# EAGLE board RatDBS-2032-2Variant (EAGLE 7.3.0)
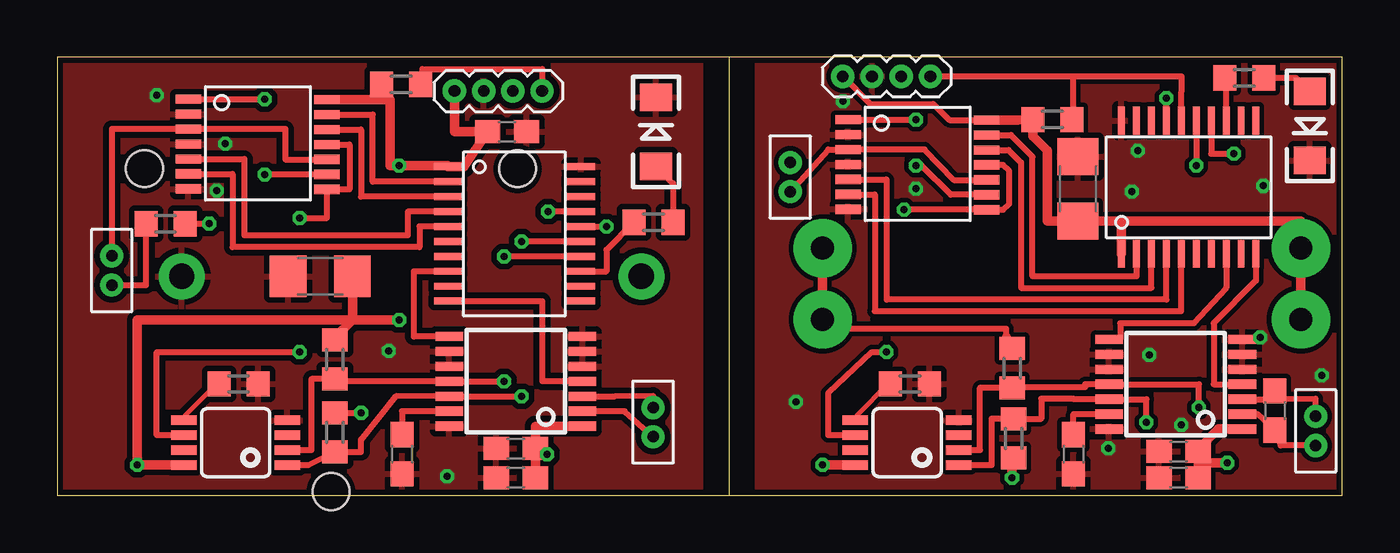
[diagram p0: board, top side]
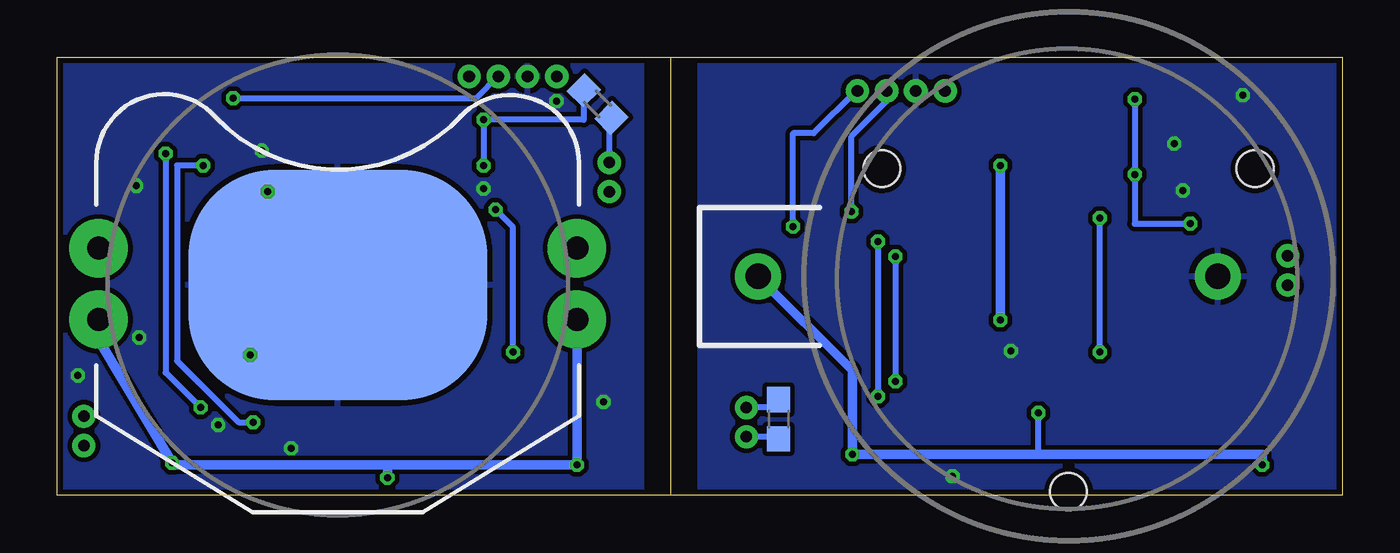
[diagram p1: board, bottom side, seen from below]

Size 55.88 x 19.05 mm. Coordinates in mm from the lower left corner, seen from the top.
Outline: 29.21,0 0,0 0,19.05 29.21,19.05
Outline: 29.21,0 55.88,0 55.88,19.05 29.21,19.05
Outline: 29.21,19.05 29.21,0
Copper layers (1*16): Top 0.035mm / dielectric 1.5mm / Bottom 0.035mm
Design rules "Seeed_DRU *": minimum track width 6mil, minimum drill 12mil, track to track 8mil, track to pad 8mil, pad to pad 8mil, via to via 8mil, smd to smd 0mil, copper to edge 10mil, drill to drill 10mil, minimum pad ring 10mil, minimum via ring 6mil, stop-mask expansion 2mil, vias tented up to drill 100mil, thermal gap 10mil

## Footprints (pad centres in the part's own frame; a part is rotated, then mirrored left to right if it is on the bottom)
FTSH-102-DH = drill 0.5 pad 1: P$1 -0.635,0; P$2 0.635,0
BATTCOM_20MM_PLASTIC_STUDS = drill 1.1 pad 2: 1 13.5,0; 2 -6.5,0 | hole 1.6: 0,9.37; -8.115,-4.685; 8.115,-4.685
BATTCON_20MM_PTH_COMPACT = drill 1 pad 2.54: 1 -10.4,1.6; 3 10.4,1.6; 4 10.4,-1.5; 5 -10.4,-1.5 | smd 13 x 10: 2 0,0
C0603 = smd 1.1 x 1: 1 -0.85,0; 2 0.85,0
C1206 = smd 1.6 x 1.8: 1 -1.4,0; 2 1.4,0
8_PIN = smd 1.1 x 0.4: 1 -2.25,0.975; 2 -2.25,0.325; 3 -2.25,-0.325; 4 -2.25,-0.975; 5 2.25,-0.975; 6 2.25,-0.325; 7 2.25,0.325; 8 2.25,0.975
1X04-1.27MM = drill 0.508 pad 1: 1 0,0; 2 1.27,0; 3 2.54,0; 4 3.81,0
LED-1206 = smd 1.2 x 1.4: A -1.5,0; C 1.5,0
20_PIN = smd 0.3 x 1.2: 1 -2.925,-2.9; 2 -2.275,-2.9; 3 -1.625,-2.9; 4 -0.975,-2.9; 5 -0.325,-2.9; 6 0.325,-2.9; 7 0.975,-2.9; 8 1.625,-2.9; 9 2.275,-2.9; 10 2.925,-2.9; 11 2.925,2.9; 12 2.275,2.9; 13 1.625,2.9; 14 0.975,2.9; 15 0.325,2.9; 16 -0.325,2.9; 17 -0.975,2.9; 18 -1.625,2.9; 19 -2.275,2.9; 20 -2.925,2.9
R0603 = smd 1 x 1.1: 1 -0.85,0; 2 0.85,0
14_PIN = smd 1.1 x 0.4: 1 -3.26,1.165; 2 -3.26,0.515; 3 -3.26,-0.135; 4 -3.26,-0.785; 5 -3.26,-1.435; 6 -3.26,-2.085; 7 -3.26,-2.735; 8 2.77,-2.755; 9 2.77,-2.105; 10 2.77,-1.455; 11 2.77,-0.805; 12 2.77,-0.155; 13 2.77,0.495; 14 2.77,1.145
PW_R-PDSO-G14 = smd 0.4 x 1.2: 1 -1.95,-2.9; 2 -1.3,-2.9; 3 -0.65,-2.9; 4 0,-2.9; 5 0.65,-2.9; 6 1.3,-2.9; 7 1.95,-2.9; 8 1.95,2.9; 9 1.3,2.9; 10 0.65,2.9; 11 0,2.9; 12 -0.65,2.9; 13 -1.3,2.9; 14 -1.95,2.9

## Placement (x,y rotation side)
ANT  FTSH-102  [FTSH-102-DH]  25.91,3.17 270 top
ANT1  FTSH-102  [FTSH-102-DH]  54.74,2.79 270 top
BAT1  20mm coincell  [BATTCOM_20MM_PLASTIC_STUDS]  11.9,9.53 180 bottom
BAT2  20mm coincell  [BATTCON_20MM_PTH_COMPACT]  43.69,9.14 0 bottom
C1  1µ  [C0603]  19.94,2.03 180 top
C2  0.1µ  [C0603]  19.94,0.76 180 top
C3  100µ  [C1206]  11.43,9.53 180 top
C4  0.1µ  [C0603]  48.77,0.76 180 top
C5  1µ  [C0603]  48.77,1.91 180 top
C_VC  0.47µ  [C0603]  14.99,1.78 270 top
C_VC1  0.47µ  [C0603]  44.2,1.78 270 top
CANT  [C0603]  24.51,3.3 270 bottom
CANT1  [C0603]  52.96,3.68 270 top
CBAT  10µ  [C0603]  19.56,15.81 180 top
CBAT1  10µ  [C1206]  44.39,13.34 270 top
DS4432U+  [8_PIN]  7.75,2.29 180 top
DS4432U+1  [8_PIN]  36.96,2.29 180 top
JP1  [1X04-1.27MM]  17.27,17.59 0 top
JP2  [1X04-1.27MM]  34.16,18.22 0 top
LED1  GREEN  [LED-1206]  54.48,16.07 270 top
LED6  GREEN  [LED-1206]  26.04,15.81 90 top
MSP1  MSP  [20_PIN]  49.21,13.4 0 top
MSP430  MSP  [20_PIN]  19.88,11.37 270 top
R1_I2C  10k  [R0603]  12.06,2.73 90 top
R1_I2C1  10k  [R0603]  41.59,2.48 270 top
R2_I2C  10k  [R0603]  12.06,5.91 90 top
R2_I2C1  10k  [R0603]  41.53,5.52 90 top
R_INPUT_FS0  47k  [R0603]  7.87,4.84 180 top
R_INPUT_FS1  47k  [R0603]  37.08,4.84 180 top
R_LED  R_LED  [R0603]  25.93,11.88 0 top
R_LED1  R_LED  [R0603]  51.63,18.16 0 top
R_LOAD_EX  10k  [R0603]  4.7,11.81 0 top
R_LOAD_EX1  10k  [R0603]  32.38,17.02 135 bottom
R_PULLUP_RST  43k  [R0603]  14.95,17.87 180 top
R_PULLUP_RST1  43k  [R0603]  43.27,16.35 180 top
STIM  FTSH-102  [FTSH-102-DH]  2.36,9.78 270 top
STIM1  FTSH-102  [FTSH-102-DH]  31.88,13.84 90 top
TS3A4751_0  SW  [14_PIN]  8.95,16.07 0 top
TS3A4751_1  SW  [14_PIN]  37.66,15.18 0 top
U$1  RF  [PW_R-PDSO-G14]  19.94,4.95 90 top
U$2  RF  [PW_R-PDSO-G14]  48.64,4.83 90 top

## Library data of the parts
ANT ANT1 STIM STIM1 = Samtec50Mil
BAT1 BAT2 = Battery
C1-C5 C_VC C_VC1 CANT CANT1 CBAT CBAT1 = rcl
DS4432U+ DS4432U+1 MSP1 MSP430 = RatDBS
JP1 JP2 = SparkFun
LED1 LED6 = SparkFun-LED
R1_I2C R1_I2C1 R2_I2C R2_I2C1 R_INPUT_FS0 R_INPUT_FS1 R_LED R_LED1 R_LOAD_EX R_LOAD_EX1 R_PULLUP_RST R_PULLUP_RST1 TS3A4751_0 TS3A4751_1 = BiphasicBoard
U$1 U$2 = RF430CL330H

## Nets
_RST: JP1.4 MSP430.16 R_PULLUP_RST.1
_RST1: JP2.4 MSP1.16 R_PULLUP_RST1.1
GND: BAT1.2 C1.2 C2.2 C3.2 C_VC.2 CBAT.1 DS4432U+.4 JP1.2 LED6.C MSP430.20 R_INPUT_FS0.1 TS3A4751_0.2 TS3A4751_0.4 TS3A4751_0.7 U$1.5 U$1.6 U$1.7 U$1.9 U$1.10 U$1.14
GND1: BAT2.2 C4.2 C5.2 C_VC1.2 CBAT1.1 DS4432U+1.4 JP2.2 LED1.C MSP1.20 R_INPUT_FS1.1 TS3A4751_1.2 TS3A4751_1.4 TS3A4751_1.7 U$2.5 U$2.6 U$2.7 U$2.9 U$2.10 U$2.14
IN1: MSP430.2 TS3A4751_0.13
IN2: MSP430.4 TS3A4751_0.5
IN3: MSP430.5 TS3A4751_0.6
IN4: MSP430.3 TS3A4751_0.12
IN5: MSP1.5 TS3A4751_1.6
IN6: MSP1.2 TS3A4751_1.13
IN7: MSP1.4 TS3A4751_1.5
IN8: MSP1.3 TS3A4751_1.12
N$1: C_VC.1 U$1.13
N$2: ANT.P$2 CANT.2 U$1.2
N$3: MSP430.8 U$1.8
N$4: R_LOAD_EX.1 STIM.P$2
N$5: MSP430.13 R_LED.1
N$6: MSP430.7
N$7: MSP430.10 U$1.4
N$8: DS4432U+.5 R_INPUT_FS0.2
N$9: LED6.A R_LED.2
N$10: DS4432U+1.5 R_INPUT_FS1.2
N$11: MSP1.13 R_LED1.1
N$12: ANT.P$1 CANT.1 U$1.3
N$13: R_LOAD_EX1.1 STIM1.P$2
N$14: MSP1.7
N$15: C_VC1.1 U$2.13
N$16: ANT1.P$2 CANT1.2 U$2.2
N$17: ANT1.P$1 CANT1.1 U$2.3
N$18: MSP1.8 U$2.8
N$19: MSP1.10 U$2.4
N$20: LED1.A R_LED1.2
SCL: DS4432U+.2 MSP430.14 R2_I2C.1 U$1.11
SCL1: DS4432U+1.2 MSP1.14 R2_I2C1.1 U$2.11
SDA: DS4432U+.1 MSP430.15 R1_I2C.1 U$1.12
SDA1: DS4432U+1.1 MSP1.15 R1_I2C1.1 U$2.12
STIM_IN: DS4432U+.6 TS3A4751_0.8 TS3A4751_0.11
STIM_IN1: DS4432U+1.6 TS3A4751_1.8 TS3A4751_1.11
STIM_OUT1: R_LOAD_EX.2 TS3A4751_0.1 TS3A4751_0.9
STIM_OUT2: STIM.P$1 TS3A4751_0.3 TS3A4751_0.10
STIM_OUT3: STIM1.P$1 TS3A4751_1.3 TS3A4751_1.10
STIM_OUT4: R_LOAD_EX1.2 TS3A4751_1.1 TS3A4751_1.9
TEST: JP1.3 MSP430.17
TEST1: JP2.3 MSP1.17
VDD: BAT1.1 C1.1 C2.1 C3.1 CBAT.2 DS4432U+.8 JP1.1 MSP430.1 R1_I2C.2 R2_I2C.2 R_PULLUP_RST.2 TS3A4751_0.14 U$1.1
VDD1: BAT2.1 BAT2.3 BAT2.4 BAT2.5 C4.1 C5.1 CBAT1.2 DS4432U+1.8 JP2.1 MSP1.1 R1_I2C1.2 R2_I2C1.2 R_PULLUP_RST1.2 TS3A4751_1.14 U$2.1

## Tracks (layer width: path | path; a pad name or v marks a point on that pad's centre or on a via)
_RST  (via drill 0.3)
  Top 0.254: R_PULLUP_RST.1 15.88,17.87 15.88,18.54 21.08,18.54 JP1.4 | MSP430.16 v23.88,11.69
  Bottom 0.254: JP1.4 21.14,17.59 22.99,15.75 23.88,15.75 v23.88,11.69
_RST1
  Top 0.254: MSP1.16 48.9,17.57 48.9,18.22 44.2,18.22 | 43.94,16.57 R_PULLUP_RST1.1 44.2,16.42 44.2,18.22 | JP2.4 44.2,18.22
GND  (via drill 0.3)
  other vias: 4.32,17.4 7.3,15.29 14.41,6.27 16.95,0.81 6.92,13.26
  pour Bottom (isolate 0.203): 0,19.05 27.94,19.05 27.94,0 0,0
  pour Top (isolate 0.254): 0,19.05 27.94,19.05 27.94,0 0,0
GND1  (via drill 0.3)
  other vias: 46.99,14.99 52.45,13.46 52.32,6.86 34.16,17.14 47.5,6.1 48.9,3.05 45.72,2.03 32.13,4.06 54.99,5.21 46.74,13.21 37.34,13.34
  pour Bottom (isolate 0.203): 30.48,19.05 55.88,19.05 55.88,0 30.48,0
  pour Top (isolate 0.203): 30.48,19.05 55.88,19.05 55.88,0 30.48,0
IN1
  Top 0.254: MSP430.2 13.72,13.64 13.72,16.56 TS3A4751_0.13
IN2
  Top 0.254: TS3A4751_0.5 8.13,14.63 8.13,11.3 15.24,11.3 15.24,12.34 MSP430.4
IN3
  Top 0.254: TS3A4751_0.6 7.62,13.98 7.62,10.79 15.75,10.79 15.75,11.69 MSP430.5
IN4
  Top 0.254: TS3A4751_0.12 13.21,15.91 13.21,12.99 MSP430.3
IN5
  Top 0.254: TS3A4751_1.6 35.56,13.09 35.56,8 48.89,8 MSP1.5
IN6
  Top 0.254: MSP1.2 46.94,9.53 42.42,9.53 42.42,14.73 41.48,15.67 TS3A4751_1.13
IN7
  Top 0.254: TS3A4751_1.5 36.04,13.74 36.07,13.72 36.07,8.51 48.24,8.51 MSP1.4
IN8
  Top 0.254: TS3A4751_1.12 41.37,15.02 41.91,14.48 41.91,9.02 47.59,9.02 MSP1.3
N$1
  Top 0.254: U$1.13 14.99,3.65 C_VC.1
N$2
  Top 0.254: ANT.P$2 24.67,3.65 U$1.2
  Bottom 0.254: CANT.2 24.6,2.54 ANT.P$2
N$3
  Top 0.254: MSP430.8 15.49,9.74 15.49,6.9 U$1.8
N$4
  Top 0.254: STIM.P$2 3.85,9.14 R_LOAD_EX.1
N$5
  Top 0.254: MSP430.13 23.88,9.74 23.88,10.67 R_LED.1
N$7
  Top 0.254: MSP430.10 21.08,8.44 21.08,4.95 U$1.4
N$8
  Top 0.203: DS4432U+.5 5.54,3.45 6.96,4.88 R_INPUT_FS0.2
N$9
  Top 0.254: LED6.A 26.78,13.56 R_LED.2
N$10
  Top 0.203: DS4432U+1.5 34.75,3.45 36.17,4.88 R_INPUT_FS1.2
N$11
  Top 0.254: MSP1.13 50.84,17.84 R_LED1.1
N$12
  Top 0.254: U$1.3 24.26,4.3 25.91,4.32 ANT.P$1
  Bottom 0.254: CANT.1 24.85,3.81 ANT.P$1
N$13
  Bottom 0.254: R_LOAD_EX1.1 31.88,16.42 STIM1.P$2
N$15
  Top 0.254: C_VC1.1 44.2,3.53 U$2.13
N$16
  Top 0.254: U$2.2 52.2,3.53 CANT1.2 53.21,2.16 ANT1.P$2
N$17
  Top 0.254: U$2.3 53.21,4.18 | ANT1.P$1 54.74,4.19 53.21,4.18 | 53.21,4.18 CANT1.1
N$18
  Top 0.254: MSP1.8 50.84,9.02 49.44,7.49 46.23,7.49 46.23,6.78 U$2.8
N$19
  Top 0.254: U$2.4 50.29,4.83 50.29,7.49 52.14,9.34 MSP1.10
N$20
  Top 0.254: R_LED1.2 53.89,18.16 LED1.A
SCL  (via drill 0.3)
  Top 0.254: DS4432U+.2 11.05,1.96 11.05,5.06 R2_I2C.1 12.06,4.95 U$1.11 v19.43,4.95 | MSP430.14 v19.43,10.39
  Bottom 0.254: v19.43,10.39 v19.43,4.95
SCL1  (via drill 0.3)
  Top 0.254: DS4432U+1.2 40.13,1.96 40.13,4.67 R2_I2C1.1 42.04,4.7 44.7,4.7 44.7,4.83 U$2.11 49.66,4.83 v49.66,3.81 | MSP1.14 50.19,14.86 v51.18,14.86
  Bottom 0.254: v51.18,14.86 51.18,5.33 v49.66,3.81
SDA  (via drill 0.3)
  Top 0.254: MSP430.15 v20.19,11.04 | DS4432U+.1 10.92,1.31 R1_I2C.1 13.21,1.88 13.21,2.41 14.73,4.32 U$1.12 v20.19,4.3
  Bottom 0.254: v20.19,11.04 v20.19,4.3
SDA1  (via drill 0.3)
  Top 0.254: MSP1.15 v49.54,14.35 | v47.37,3.17 47.37,4.18 U$2.12 44.2,4.18 44.2,4.19 42.8,4.19 42.8,3.33 R1_I2C1.1 40.64,3.33 40.64,1.31 DS4432U+1.1
  Bottom 0.254: v49.54,14.35 50.67,14.35 50.67,5.84 48.01,3.17 v47.37,3.17
STIM_IN  (via drill 0.3)
  Top 0.254: DS4432U+.6 4.32,2.61 4.32,6.22 v10.54,6.22 | v10.54,12.06 11.72,12.06 TS3A4751_0.8 12.7,13.31 12.7,15.26 TS3A4751_0.11
  Bottom 0.254: v10.54,6.22 v10.54,12.06
STIM_IN1  (via drill 0.3)
  Top 0.254: DS4432U+1.6 33.53,2.61 33.53,4.45 35.43,6.22 v36.07,6.22 | TS3A4751_1.11 41.15,14.37 41.4,14.12 41.4,12.68 41.15,12.42 TS3A4751_1.8 v36.83,12.42
  Bottom 0.254: v36.07,6.22 36.07,11.66 v36.83,12.42
STIM_OUT1  (via drill 0.3)
  Top 0.254: TS3A4751_0.9 v9.02,13.96 | TS3A4751_0.1 v9.02,17.23 | R_LOAD_EX.2 v6.6,11.81
  Bottom 0.254: v9.02,17.23 v9.02,13.96 9.02,11.81 v6.6,11.81
STIM_OUT2
  Top 0.254: TS3A4751_0.10 9.91,14.61 9.91,15.93 TS3A4751_0.3 2.36,15.93 STIM.P$1
STIM_OUT3
  Top 0.254: STIM1.P$1 33.53,15.04 TS3A4751_1.3 37.72,15.04 38.99,13.72 TS3A4751_1.10
STIM_OUT4  (via drill 0.3)
  Top 0.254: TS3A4751_1.9 38.86,13.08 37.59,14.35 v37.34,14.34 | TS3A4751_1.1 v37.34,16.34
  Bottom 0.254: v37.34,14.34 v37.34,16.34 32.99,16.34 R_LOAD_EX1.2
TEST  (via drill 0.3)
  Top 0.254: MSP430.17 v21.34,12.34
  Bottom 0.254: v21.34,12.34 21.34,15.62 19.81,17.14 JP1.3
TEST1  (via drill 0.3)
  Top 0.254: MSP1.17 v48.24,17.27
  Bottom 0.254: v48.24,17.27 37.66,17.27 JP2.3
VDD  (via drill 0.3)
  Top 0.254: R_PULLUP_RST.2 14.22,17.87 14.22,17.21 | R1_I2C.2 v13.21,3.58
  Top 0.406: 12.83,7.62 3.48,7.62 v3.48,1.31 DS4432U+.8 | TS3A4751_0.14 14.22,17.21 14.48,17.21 14.48,14.35 v14.86,14.35 16.98,14.35 MSP430.1 17.7,14.29 CBAT.2 17.27,15.81 JP1.1 | C2.1 C1.1 | U$1.1 20.79,3 C1.1 | v21.3,1.78 20.79,1.78 C1.1 | 12.83,7.62 C3.1 | 12.83,7.62 v14.86,7.62 | 12.83,7.62 12.06,6.86 R2_I2C.2
  Bottom 0.254: 13.21,1.78 v13.21,3.58
  Bottom 0.406: v3.48,1.31 3.48,1.78 13.21,1.78 v21.3,1.78 21.3,5.42 BAT1.1 | v14.86,7.62 v14.86,14.35
VDD1  (via drill 0.3)
  Top 0.254: 41.27,6.86 41.27,7.24 33.29,7.24 BAT2.4 | JP2.1 35.37,17.02 38.1,17.02 38.8,16.32 TS3A4751_1.14
  Top 0.406: TS3A4751_1.14 41.79,16.32 R_PULLUP_RST1.2 42.42,15.62 43.05,14.99 43.05,11.94 CBAT1.2 | R2_I2C1.2 41.27,6.86 | BAT2.3 BAT2.4 | v33.29,1.31 DS4432U+1.8 | BAT2.5 BAT2.1 54.09,11.94 CBAT1.2 | U$2.1 50.5,2.88 49.62,1.99 C5.1 C4.1 49.62,1.4 v50.89,1.4 | R1_I2C1.2 41.53,1.63 v41.53,0.76 | CBAT1.2 46.29,11.94 MSP1.1
  Bottom 0.406: BAT2.4 v33.29,1.31 41.53,1.31 | BAT2.5 54.09,6.76 v50.89,1.4 50.89,1.31 41.53,1.31 | v41.53,0.76 41.53,1.31

## Text on the board
tDocu: VGTR | STIM
bDocu: NFC-RDBS v1.2 / Kemere Lab / (C)2015 | STIM | NFC-RDBS v1.2b / Kemere Lab (C)2015